# Allegro board smarios_ap.brd
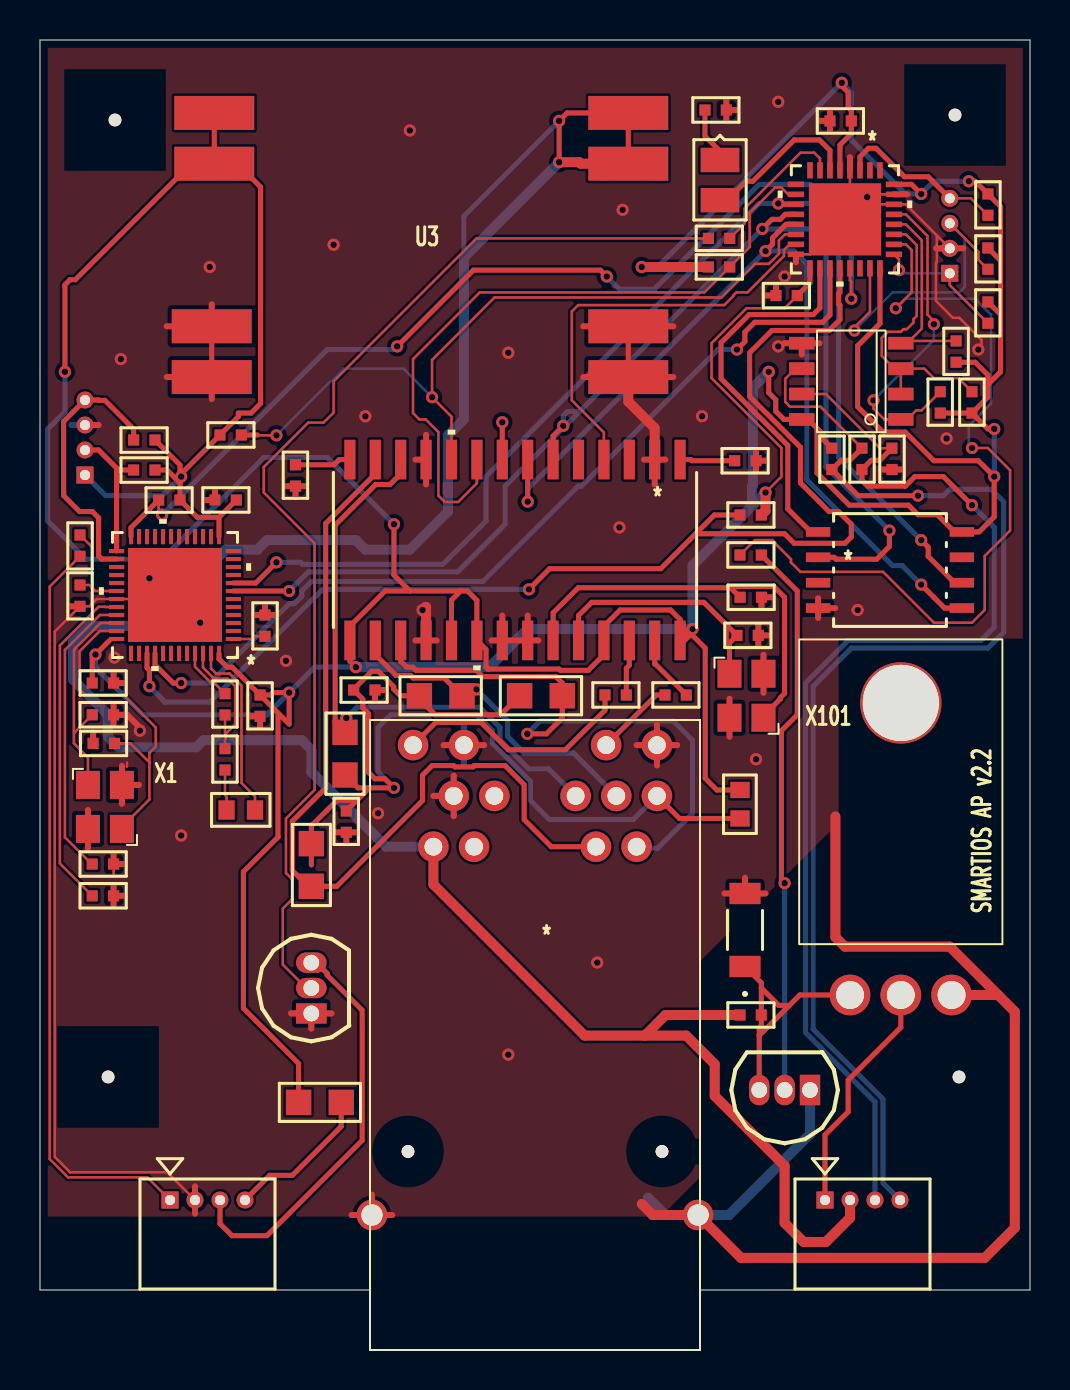
[diagram p0: board, top side]
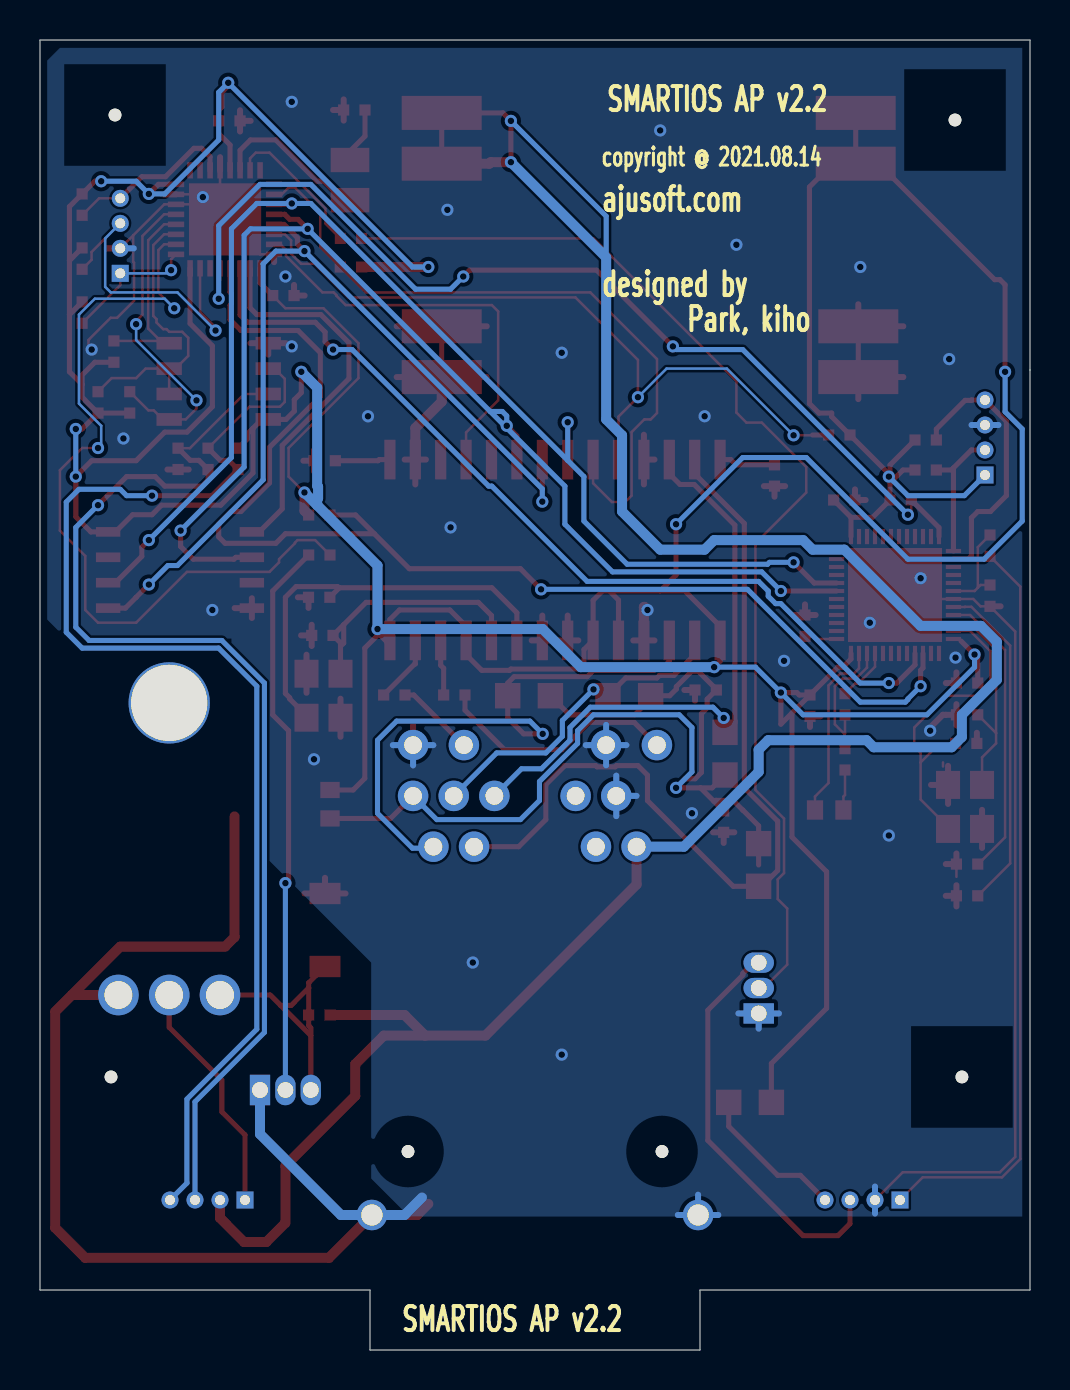
[diagram p1: board, bottom side, seen from below]

Outline 49.5 x 65.5 mm; copper layers: TOP, BOTTOM. Coordinates in mm from the lower left corner of the outline.
Outline path: 0,65.5 0,3 16.5,3 16.5,0 33,0 33,3 49.5,3 49.5,65.5 0,65.5

## Design rules (mm)
constraint set DEFAULT: min track width 0.127

## Placement (name value [footprint] x y rotation side)
C2  10uF  [SMC0402]  40.56 61.46 180 top
C3  10uF  [SMC0402]  37.87 52.72 180 top
C4  100nF  [SMC0402]  11.25 36.75 270 top
C5  100nF  [SMC0402]  8.75 42.5 0 top
C6  4.7uF  [SMC0402]  2.61 33.35 0 top
C7  0.8pF  [SMC0402]  2 38.25 270 top
C8  0.8pF  [SMC0402]  2.61 22.71 0 top
C9  100pF  [SMC0402]  2.61 24.3 0 top
C10  12pF  [SMC0402]  2.61 31.76 0 top
C11  12pF  [SMC0402]  3.72 30.33 180 top
C12  100nF  [SMC0402]  11 32.75 270 top
C13  1uF  [SMC0402]  9.25 31.75 90 top
C101  20pF  [SMC0402]  35.01 37.64 0 top
C102  20pF  [SMC0402]  34.85 35.73 0 top
C103  10uF  [SMC0402]  35.8 44.46 180 top
C104  10nF  [SMC0402]  16.75 33 180 top
C105  10nF  [SMC0402]  15.32 25.88 90 top
D1  LED  [SMD0805]  34 59.5 270 top
D2  5.6V  [SOD-80-2_3P6X1P5_ONS-M]  35.25 21 90 top
J1  CON_530480410  [CON_530480410_MOL]  2.25 43.75 90 top
J2  CON_530480410  [CON_530480410_MOL]  45.49 53.83 90 top
J4  CON_530480410  [CON_530480410_MOL]  6.5 7.5 0 top
J5  CON_530480410  [CON_530480410_MOL]  39.25 7.5 0 top
J101  RJ45-POE-XPJH-01R-1-Q22-17C  [RJ45-POE-XPJH]  24.75 6.75 0 top
L1  3.9nH  [SMR0402]  2 40.75 270 top
L2  15nH  [SMR0402]  9.25 29 90 top
L3  10uH  [SMR0603]  10.75 27 180 top
L101  10uH  [SMR0603]  35 28 270 top
NOREF  -  [unnamed]  3.75 61.5 90 top
NOREF#2  -  [unnamed]  3.41 13.65 90 top
NOREF#3  -  [#2]  5 2.5 0 top
NOREF#4  -  [#2]  0 3 90 top
NOREF#5  -  [#2]  45.75 61.75 0 top
NOREF#6  -  [#2]  0 65.5 0 top
NOREF#7  -  [#2]  16.5 0 90 top
NOREF#8  -  [#2]  11.75 2.5 0 top
NOREF#9  -  [#2]  45.75 61.75 90 top
NOREF#10  -  [unnamed]  45.75 61.75 90 top
NOREF#11  -  [#2]  46.52 3 90 top
NOREF#12  -  [unnamed]  45.95 13.65 90 top
NOREF#13  -  [#2]  0 2.5 0 top
NOREF#14  -  [#2]  45.95 13.65 0 top
NOREF#15  -  [#2]  3.5 0 90 top
Q1  2N5551  [TO92]  13.56 16.83 90 top
Q2  IRF540N/TO  [TO220ABH]  40.5 17.75 270 top
Q3  2N5551  [TO92]  38.5 13 180 top
R1  1k  [SMR0402]  7 42.5 180 top
R2  1k  [SMR0402]  5.75 44 180 top
R3  1k  [SMR0402]  5.75 45.5 180 top
R4  1k  [SMR0402]  47.39 57.8 270 top
R5  1k  [SMR0402]  47.39 52.4 270 top
R6  1k  [SMR0402]  47.39 55.1 270 top
R7  1k  [SMR0402]  35 41.75 0 top
R8  50R  [SMR0805]  12.93 12.38 0 top
R9  2K7  [SMR0402]  33.42 55.58 0 top
R10  1k  [SMR0402]  33.25 62 0 top
R11  2k7  [SMR0402]  35 16.75 0 top
R12  10K  [SMR0402]  35 39.75 0 top
R14  10K  [SMR0402]  39.6 45.09 270 top
R15  10K  [SMR0402]  42.6 45.09 270 top
R16  120R  [SMR0402]  41.1 45.09 270 top
R17  10K  [SMR0402]  46.6 46.85 90 top
R18  10K  [SMR0402]  45.81 49.39 90 top
R19  10K  [SMR0402]  45.01 46.85 90 top
R101  210K  [SMR0402]  9 45.75 0 top
R102  110K  [SMR0402]  33.42 54.15 0 top
R103  2K7  [SMR0402]  12.77 43.19 90 top
R104  1k  [SMR0402]  28.25 32.75 0 top
R105  1k  [SMR0402]  31.25 32.75 0 top
R106  50R  [SMR0805]  13.57 23.18 90 top
R107  50R  [SMR0805]  15.25 28.75 90 top
R108  50R  [SMR0805]  26.11 32.71 180 top
R109  50R  [SMR0805]  18.97 32.71 0 top
U1  NRF52832-QFAA-R  [QFN-48_NOR]  6.75 37.75 180 top
U2  IS25LP080  [SOIC8_208MIL-L]  42.5 39 0 top
U3  MP1584_Board  [MP1584_MODULE]  19 55.25 0 top
U4  STM32L082KB  [UFQFPN32-5X5MM-L]  40.25 56.53 270 top
U5  MAX485/SO  [SOIC8]  40.56 48.43 180 top
U101  ENC28J60-ISO  [SOIC28-W_MC_MCH]  23.75 40 270 top
X1  32MHz  [SMD-3225_4P]  3.25 27.15 90 top
X101  25MHz  [SMD-3225_4P]  35.32 32.71 90 top

## Library data of the parts
C2 C3 = CAP POL
C4-C13 C101-C105 = CAP NP
D1 = LED_0
D2 = DIODE ZENER: User Part Number: PN; Tolerance: TOL
J1 J2 J4 J5 = 530480410: User Part Number: PN; Tolerance: TOL
J101 = RJ45-POE-XPJH-01R-1-Q22-17C
L1-L3 = INDUCTOR
L101 = INDUCTOR/SM
Q1 Q3 = 2N5551
Q2 = IRF540N/TO
R1-R10 R101-R105 = R
R11 R12 R14-R19 R106-R109 = RESISTOR
U1 = NRF52832-QFAA-R_0: User Part Number: PN; Tolerance: TOL
U2 = IS25LPxxx: User Part Number: PN; Tolerance: TOL
U3 = MP1584_Board_3
U4 = STM32L412K8_8: User Part Number: PN; Tolerance: TOL
U5 = MAX485/SO_2: Tolerance: ***; User Part Number: ***
U101 = ENC28J60-ISO_0: User Part Number: PN; Tolerance: TOL
X1 X101 = CRYSTAL_0

## Footprints (pads in the part's own frame, mm; a bottom-side part is the same pattern mirrored in y, then rotated)
CON_530480410_MOL
  rect 0.85x0.85 hole 0.5: 1(0,0)
  round 0.85 hole 0.5: 2(1.25,0) 3(2.5,0) 4(3.75,0)
MP1584_MODULE
  rect 4x1.7 smd: 1(-10.287,6.604) 2(-10.287,4.064) 3(-10.414,-4.064) 4(-10.414,-6.604) 5(10.414,-6.604) 6(10.414,-4.064) 7(10.414,4.064) 8(10.414,6.604)
QFN-48_NOR
  rect 0.762x0.203 smd: 1(-2.921,2.2) 2(-2.921,1.8) 3(-2.921,1.4) 4(-2.921,1) 5(-2.921,0.6) 6(-2.921,0.2) 7(-2.921,-0.2) 8(-2.921,-0.6) 9(-2.921,-1) 10(-2.921,-1.4) 11(-2.921,-1.8) 12(-2.921,-2.2) 25(2.921,-2.2) 26(2.921,-1.8) 27(2.921,-1.4) 28(2.921,-1) 29(2.921,-0.6) 30(2.921,-0.2) 31(2.921,0.2) 32(2.921,0.6) 33(2.921,1) 34(2.921,1.4) 35(2.921,1.8) 36(2.921,2.2)
  rect 0.203x0.762 smd: 13(-2.2,-2.921) 14(-1.8,-2.921) 15(-1.4,-2.921) 16(-1,-2.921) 17(-0.6,-2.921) 18(-0.2,-2.921) 19(0.2,-2.921) 20(0.6,-2.921) 21(1,-2.921) 22(1.4,-2.921) 23(1.8,-2.921) 24(2.2,-2.921) 37(2.2,2.921) 38(1.8,2.921) 39(1.4,2.921) 40(1,2.921) 41(0.6,2.921) 42(0.2,2.921) 43(-0.2,2.921) 44(-0.6,2.921) 45(-1,2.921) 46(-1.4,2.921) 47(-1.8,2.921) 48(-2.2,2.921)
  rect 4.699x4.699 smd: 49(0,0)
RJ45-POE-XPJH
  round 0.635 hole 3.175 unplated: (-6.35,3.175) (6.35,3.175)
  round 1.524 hole 0.889: 1(5.08,18.415) 2(3.048,18.415) 5(-3.048,18.415) 6(-5.08,18.415) 7(6.096,20.955) 8(4.064,20.955) 9(2.032,20.955) 10(-2.032,20.955) 11(-4.064,20.955) 12(6.096,23.495) 13(3.556,23.495) 14(-3.556,23.495) 15(-6.096,23.495)
  round 1.524 hole 1.067: 16(-8.153,0) 17(8.153,0)
SMC0402
  rect 0.559x0.559 smd: 1(0,0) 2(1.067,0)
SMD0805
  rect 1.219x1.93 smd: A(2.007,0) C(0,0)
SMD-3225_4P
  rect 1.4x1.2 smd: 1(-1.1,-0.85) 2(1.1,-0.85) 3(1.1,0.85) 4(-1.1,0.85)
SMR0402
  rect 0.559x0.559 smd: 1(0,0) 2(1.067,0)
SMR0603
  rect 0.813x0.965 smd: 1(0,0) 2(1.422,0)
SMR0805
  rect 1.27x1.27 smd: 1(0,0) 2(2.134,0)
SOD-80-2_3P6X1P5_ONS-M
  rect 1.067x1.551 smd: 1(-1.825,0) 2(1.825,0)
SOIC8
  rect 1.27x0.635 smd: 1(-2.477,1.905) 2(-2.477,0.635) 3(-2.477,-0.635) 4(-2.477,-1.905) 5(2.477,-1.905) 6(2.477,-0.635) 7(2.477,0.635) 8(2.477,1.905)
SOIC8_208MIL-L
  rect 1.219x0.483 smd: 1(-3.594,1.905) 2(-3.594,0.635) 3(-3.594,-0.635) 4(-3.594,-1.905) 5(3.594,-1.905) 6(3.594,-0.635) 7(3.594,0.635) 8(3.594,1.905)
SOIC28-W_MC_MCH
  rect 1.981x0.559 smd: 1(-4.521,8.255) 2(-4.521,6.985) 3(-4.521,5.715) 4(-4.521,4.445) 5(-4.521,3.175) 6(-4.521,1.905) 7(-4.521,0.635) 8(-4.521,-0.635) 9(-4.521,-1.905) 10(-4.521,-3.175) 11(-4.521,-4.445) 12(-4.521,-5.715) 13(-4.521,-6.985) 14(-4.521,-8.255) 15(4.521,-8.255) 16(4.521,-6.985) 17(4.521,-5.715) 18(4.521,-4.445) 19(4.521,-3.175) 20(4.521,-1.905) 21(4.521,-0.635) 22(4.521,0.635) 23(4.521,1.905) 24(4.521,3.175) 25(4.521,4.445) 26(4.521,5.715) 27(4.521,6.985) 28(4.521,8.255)
TO92
  rect 1.016x1.524 hole 0.787: 1(0,0)
  oval 1.016x1.524 hole 0.787: 2(1.27,0) 3(2.54,0)
TO220ABH
  round 2.032 hole 1.397: 1(0,0) 2(0,2.54) 3(0,5.08)
  round 4.064 hole 3.81: 4(-14.605,2.54)
UFQFPN32-5X5MM-L
  rect 0.813x0.279 smd: 1(-2.451,1.75) 2(-2.451,1.25) 3(-2.451,0.75) 4(-2.451,0.25) 5(-2.451,-0.25) 6(-2.451,-0.75) 7(-2.451,-1.25) 8(-2.451,-1.75) 17(2.451,-1.75) 18(2.451,-1.25) 19(2.451,-0.75) 20(2.451,-0.25) 21(2.451,0.25) 22(2.451,0.75) 23(2.451,1.25) 24(2.451,1.75)
  rect 0.279x0.813 smd: 9(-1.75,-2.451) 10(-1.25,-2.451) 11(-0.75,-2.451) 12(-0.25,-2.451) 13(0.25,-2.451) 14(0.75,-2.451) 15(1.25,-2.451) 16(1.75,-2.451) 25(1.75,2.451) 26(1.25,2.451) 27(0.75,2.451) 28(0.25,2.451) 29(-0.25,2.451) 30(-0.75,2.451) 31(-1.25,2.451) 32(-1.75,2.451)
  rect 3.607x3.607 smd: 33(0,0)
unnamed
  round 0.635 hole 3.175 unplated: (0,0)

## Nets
3V3: C2.1 C3.1 C5.2 C6.1 C12.1 J1.1 L101.1 R1.1 R2.1 R3.1 R4.1 R5.1 R6.1 R7.2 R8.1 R14.1 R17.1 R18.1 R19.1 R101.1 R102.1 U1.13 U1.36 U1.48 U2.8 U3.1 U3.2 U4.5 U4.17 U4.24 U4.32 U5.8(VCC) U101.15 U101.19 U101.20 U101.25 U101.28
485A: J5.4 R14.2 R16.1 U5.6
485B: J5.3 R15.1 R16.2 U5.7
485DE: R17.2 U4.27 U5.2 U5.3
485RX: R19.2 U4.29 U5.1
485TX: R18.2 U4.28 U5.4
ANT: J4.1 L1.2
BLE_SS: U1.40 U4.19
BLERDY: R7.1 U1.39 U4.20
DOORSIG: R12.1 U4.26
INT: U4.15 U101.4
LAN_RST: R101.2 U4.14 U101.10
LAN_SS: R102.2 U4.10 U101.9
LED_A: J4.4 R8.2
LED_K: J4.3 Q1.3
LED_LINE: D1.A U4.6
LEDA: R105.2 U101.27
LEDB: R104.2 U101.26
LEDSIG: R9.2 U4.7
MEM_CS: U2.1 U4.18
MISO: U1.7 U2.2 U4.12 U101.6
MOSI: U2.5 U4.13 U101.7
NRST: J2.4 R4.2 U4.3
NRST_1: R1.2 U1.24 U4.21
POE+: J5.2 J101.6 R11.1 U3.7 U3.8(IN2)
POE-: C2.2 C3.2 C4.1 C5.1 C6.2 C7.2 C8.2 C9.2 C10.2 C11.2 C12.2 C101.2 C102.2 C103.1 C104.1 C105.1 D2.2 J1.3 J2.2 J4.2 J101.11 J101.12 J101.14(YLED_K) J101.16 J101.17 Q1.1(EMITTER) Q2.3(S) Q3.1(EMITTER) R10.2 R15.2 R103.1 U1.31 U1.49 U2.4 U3.3 U3.4 U3.5 U3.6 U4.4(VSSA) U4.16 U4.30 U4.31 U4.33 U5.5 U101.2 U101.11 U101.18(VSSTX) U101.21 U101.22 X1.2 X1.4(GND2) X101.2 X101.4(GND2)
RX+: J101.2 R106.1 U101.13
RX-: J101.9 R107.2 U101.12
RXD: U4.9
SCK: U1.8 U2.6 U4.11 U101.8
SWCLK: J2.1 R5.2 U4.25
SWCLK_1: J1.2 R2.2 U1.25
SWDIO: J2.3 R6.2 U4.23
SWDIO_1: J1.4 R3.2 U1.26
TX+: J101.1 R108.1 U101.17
TX-: J101.8 R109.2 U101.16
TXD: U4.8
N01924: C101.1 U101.23 X101.1
N01933: C102.1 U101.24 X101.3
N03095: R103.2 U101.14
N03125: C103.2 U101.1
N03600: J101.13 R105.1
N03602: J101.15 R104.1
N03982: C104.2 C105.2 J101.7 L101.2 R106.2 R107.1 R108.2 R109.1
N99742: J5.1 Q2.2
N99768: D2.1(CATHODE) Q2.1 Q3.3 R11.2
N99852: Q3.2 R12.2
N100473: D1.C(CATHODE) R10.1
N100557: Q1.2 R9.1
N109479: C4.2 U1.1
N112351: C7.1 L1.1 U1.30
N112725: C8.1 U1.32
N112729: C9.1 U1.33
N112745: C10.1 U1.34 X1.3
N112777: C11.1 U1.35(XC2) X1.1
N112868: L3.1 U1.47
N112917: C13.1 L2.2 U1.46
N112982: C13.2 U1.45
N1121240: L2.1 L3.2

Pads without a net: J101 5 10; Q2 4; U1 2 3 4 5 6 9 10 11 12 14 15 16 17 18 19 20 21 22 23 27 28 29 37 38 41 42 43 44; U2 3 7; U4 1 2 22; U101 3 5

## Via types
v1: diameter 0.61, hole 0.33, TOP to BOTTOM, 78 vias

## Routing (per net, layer and track width the routed paths; a pad name or vN(x,y) marks a point on that pad's centre or on a via; arc(x,y) is an arc through that point)
3V3: length 314.6
  TOP w0.127: C3.1 37.23,52.09 35.32,52.09 33.58,50.34 33.58,48.59 37.07,45.1 37.07,43.67 v1(36.28,42.88) ; 3.45,35.45 3.55,35.55 U1.36
  TOP w0.254: U4.24 42,51.33 40.88,50.21 40.88,47.16 42.15,45.89 43.26,45.89 44.69,44.46 46.92,44.46 v1(47.71,43.67) 47.71,41.66 46.96,40.91 U2.8 45.73,40.91 44.87,41.76 43.9,41.76 43.42,42.24 40.46,42.24 38.85,43.85 38.85,46.08 ; R17.1 47.39,46.05 v1(47.71,46.05) ; R17.1 R19.1 ; R17.1 47.39,47.64 47.39,48.28 ; 8.95,41.63 7.87,41.63 R1.1 7,43.35 ; 8.95,41.63 C5.2 ; 8.95,41.63 U1.13 ; v1(40.09,63.36) 40.09,63.2 40.41,62.88 40.41,62.15 40.56,61.99 C2.1 40.56,60.82 40,60.25 U4.5 ; 21.03,37.95 18.49,37.95 ; 21.03,37.95 20.57,37.5 U101.19 ; 21.03,37.95 21.37,37.95 21.84,37.48 U101.20 22.3,35.02 22.3,34.14 22.4,34.05 25.95,34.05 26.02,33.98 27.41,33.98 28.2,34.77 U101.25 28.2,36.19 29.01,37 31.53,37 32,36.52 32,35.48 ; 18.49,37.95 17.26,37.95 15.49,36.19 U101.15 15.49,34.44 v1(15.79,34.14) ; 18.49,37.95 17.7,38.75 v1(17.7,41.29) ; U3.2 U3.1 ; U3.2 9.86,59.31 11.03,58.15 11.03,47.32 10.55,46.85 9.92,46.85 9.92,46.67 R101.1 7.06,43.81 ; U3.2 7.56,59.31 1.76,53.52 1.5,53.52 1.25,53.26 v1(1.25,48.91) ; 7,43.35 7,43.75 ; 7,43.35 6.35,44 R2.1 ; 7,43.75 7,44.25 R3.1 ; 7,43.75 7.06,43.81 ; 38.85,46.08 38.41,46.53 U5.8 37.2,46.53 36.79,46.94 36.79,47.51 36.44,47.86 v1(36.44,48.91) ; 38.85,46.08 39.14,45.8 39.14,45.55 R14.1 ; 48.03,51.77 48.03,54.47 ; 48.03,51.77 R5.1 ; 48.03,51.77 48.03,48.91 47.39,48.28 ; 48.03,54.47 48.03,57.17 R4.1 46.76,58.44 v1(46.44,58.44) ; 48.03,54.47 R6.1 ; v1(7.06,43.67) 7.06,43.81 ; 11.9,31.85 12.46,31.29 v1(12.46,32.87) 11.65,32.87 11.53,32.75 C12.1 ; 11.9,31.85 11.9,25.65 10.17,23.91 10.17,17.09 12.93,14.33 R8.1 ; 11.9,31.85 C12.1 ; U1.48 8.95,34.55 9.36,34.14 9.61,34.14 C12.1 ; 3.45,35.45 v1(2.77,34.77) 2.61,34.61 C6.1 ; v1(44.06,57.8) 43.58,58.28 U4.32 ; R18.1 46.76,49.39 47.39,48.75 47.39,48.28 ; L101.1 33.84,28 33.26,28.58 33.26,35.09 32.54,35.82 32.54,35.96 ; C3.1 38.5,53.35 U4.17
  TOP w0.5: v1(32.62,36.05) 32.06,35.48 32,35.48 ; v1(36.28,42.88) 36.28,41.96 R7.2 ; v1(30.08,54.15) R102.1
  BOTTOM w0.254: v1(2.77,34.77) 2.77,34.14 5.15,31.76 11.35,31.76 v1(12.46,32.87) 13.73,34.14 v1(15.79,34.14) ; v1(47.71,43.67) v1(47.71,46.05) ; v1(1.25,48.91) 1.25,46.91 0.39,46.05 0.39,41.45 2.29,39.54 6.11,39.54 11.19,44.62 14.36,44.62 v1(17.7,41.29) ; v1(7.06,43.67) 6.11,42.72 3.28,42.72 J1.1 ; v1(46.44,58.44) 44.69,58.44 v1(44.06,57.8) 43.26,57.8 40.56,60.5 40.56,62.88 v1(40.09,63.36) 30.88,54.15 v1(30.08,54.15)
  BOTTOM w0.5: 35.64,42.24 35.64,42.55 35.6,42.59 35.6,43.16 35.64,43.2 35.64,48.12 v1(36.44,48.91) ; 35.64,42.24 32.62,39.22 v1(32.62,36.05) 24.37,36.05 22.46,34.14 v1(15.79,34.14) ; 35.64,42.24 v1(36.28,42.88)
485A: length 63.1
  TOP w0.127: R16.1 39.03,47.16 37.5,47.16 37.26,47.4 37.26,48.56 37.77,49.07 U5.6
  TOP w0.254: R16.1 40.49,44.48 40.06,44.48 R14.2 40.9,42.72 v1(43.9,42.72)
  BOTTOM w0.254: v1(43.9,42.72) 45.17,42.72 45.49,43.03 47.55,43.03 48.19,42.4 48.19,35.89 47.39,35.09 40.56,35.09 38.66,33.19 38.66,16.04 42.15,12.55 42.15,8.35 J5.4
485B: length 59
  TOP w0.127: U5.7 39.29,47.8 42,45.09 R15.1
  TOP w0.254: v1(46.6,42.24) 45.17,43.67 43.74,43.67 43.26,43.19 41.4,43.19 41.1,43.49 R16.2 41.56,44.48 41.99,44.48 R15.1
  BOTTOM w0.254: J5.3 41.75,12.41 38.28,15.88 38.28,33.35 40.41,35.48 47.04,35.48 47.71,36.14 47.71,41.13 v1(46.6,42.24)
485DE: length 14.6
  TOP w0.127: U5.2 U5.3 ; U5.3 44.22,49.07 44.69,48.59 45.92,48.59 R17.2 ; U5.3 42.72,49.07 42.09,49.7 42.09,50.61 42.39,50.91 43.04,50.91 43.17,51.04 43.34,51.04 43.67,51.37 43.67,51.54 43.84,51.71 43.84,55.24 43.3,55.78 U4.27
485RX: length 16.3
  TOP w0.127: v1(41.68,47.48) 41.68,47.07 42.22,46.53 U5.1 43.36,46.53 43.81,46.98 44.08,46.98 R19.2 ; U4.29 43.3,56.78 44.38,55.7 44.38,51.77 44.69,51.45 v1(44.69,51.29)
  BOTTOM w0.127: v1(41.68,47.48) 44.69,50.5 v1(44.69,51.29)
485TX: length 9.8
  TOP w0.127: 43.47,50.45 43.36,50.34 U5.4 ; 43.47,50.45 44.09,51.07 44.09,55.49 43.3,56.28 U4.28 ; 43.47,50.45 R18.2
ANT: length 37.6
  TOP w0.127: J4.1 5.37,8.63 1.4,8.63 0.48,9.55 0.48,38.17 L1.2
BLE_SS: length 45.1
  TOP w0.254: U4.19 39.5,51.75 39.14,51.39 35.74,51.39 35.24,50.9 35.24,50.42 v1(34.85,50.02) ; U1.40 5.75,34.26 6.66,33.35 v1(7.06,33.35)
  BOTTOM w0.254: v1(7.06,33.35) 8.49,33.35 12.46,37.32 12.72,37.32 13.09,37.69 13.09,37.95 13.57,38.43 22.14,38.43 26.91,43.19 27.07,43.19 33.9,50.02 v1(34.85,50.02)
BLERDY: length 63
  TOP w0.254: v1(5.47,33.19) 5.47,33.98 5.35,34.1 U1.39 ; 32.78,40.81 33.72,41.75 R7.1 ; 32.78,40.81 37.23,40.81 37.71,40.34 40.25,40.34 40.56,40.65 40.56,41.29 39.93,41.92 39.45,41.92 38.02,43.35 38.02,45.13 35.48,47.68 35.48,49.86 36.59,50.97 39.45,50.97 40,51.52 40,52.24 39.93,52.3 39.93,52.82 40,52.89 U4.20 ; 32.78,40.81 31.04,39.06 25.48,39.06 v1(24.45,38.03)
  BOTTOM w0.254: v1(24.45,38.03) 14.12,38.03 8.49,32.4 6.23,32.4 6.11,32.52 6.11,32.55 v1(5.47,33.19)
DOORSIG: length 41.2
  TOP w0.127: U4.26 43.3,55.28 43.58,55 43.58,52.88 v1(42.79,52.09) ; v1(46.6,45.1) 47.39,45.1 48.5,43.99 48.5,40.97 47.23,39.7 47.23,37 46.6,36.37 44.69,36.37 42.15,38.91 38.02,38.91 37.55,39.38 37.55,39.54 36.75,40.34 36.75,40.37 36.63,40.49 35.74,40.49 R12.1
  BOTTOM w0.127: v1(42.79,52.09) 43.26,52.56 46.76,52.56 47.55,51.77 47.55,47.32 46.44,46.21 46.44,45.26 v1(46.6,45.1)
INT: length 20.9
  TOP w0.127: U101.4 28.2,45.88 26.59,47.48 26.59,51.93 26.91,52.25 34.21,52.25 34.69,52.72 34.69,52.75 34.82,52.88 35.38,52.88 37.2,54.7 37.2,55 37.48,55.28 U4.15
LAN_RST: length 38.1
  TOP w0.127: 10.87,45.75 10.88,45.73 v1(11.82,45.73) ; U101.10 20.57,46.67 v1(19.6,47.64) 19.6,49.5 22.73,52.63 34.08,52.63 35.76,54.31 36.45,54.31 36.95,54.81 36.95,55.48 37.25,55.78 U4.14
  TOP w0.254: 10.87,45.75 R101.2
  BOTTOM w0.127: v1(19.6,47.64) 18.17,49.07 15.16,49.07 v1(11.82,45.73)
LAN_SS: length 35
  TOP w0.127: U101.9 21.84,43.34 20.9,42.4 20.24,42.4 19.92,42.72 19.92,45.89 19.29,46.53 18.97,46.53 18.65,46.85 18.65,49.55 21.99,52.88 33.22,52.88 R102.2 35.48,55.15 35.48,56.85 36.75,58.12 37.07,58.12 37.41,57.78 U4.10
LED_A: length 7.5
  TOP w0.254: J4.4 11.48,8.73 12.62,8.73 15.06,11.18 R8.2
LED_K: length 20.6
  TOP w0.254: Q1.3 13.82,19.37 14.36,18.83 14.36,18.74 16.11,16.99 16.11,10.48 11.35,5.72 9.6,5.72 9,6.32 J4.3
LED_LINE: length 8
  TOP w0.254: D1.A 34.36,57.49 35.3,58.44 35.64,58.44 37.71,60.5 38.98,60.5 39.5,59.98 U4.6
LEDA: length 3.4
  TOP w0.254: U101.27 30.73,34.3 30.77,34.3 R105.2
LEDB: length 2.8
  TOP w0.254: R104.2 29.32,34.09 29.46,34.23 U101.26
LEDSIG: length 7.4
  TOP w0.127: R9.2 35.23,56.32 35.23,57.07 38.02,59.87 38.71,59.87 39,59.58 U4.7
MEM_CS: length 19.3
  TOP w0.254: U4.18 39,52.11 38.66,51.77 35.46,51.77 34.05,50.37 34.05,48.57 37.39,45.23 37.39,42.05 38.54,40.91 U2.1
MISO: length 64.4
  TOP w0.254: U1.7 v1(12.46,37.95) ; v1(36.12,56.06) 36.59,56.53 37.01,56.53 37.26,56.78 U4.12 ; v1(42.47,40.97) 42.47,40.18 41.84,39.54 39.8,39.54 39.71,39.63 U2.2 ; v1(26.16,46.21) 25.66,45.7 U101.6
  BOTTOM w0.254: 26.99,46.93 23.26,43.19 23.26,41.29 20.87,38.91 13.41,38.91 v1(12.46,37.95) ; 26.99,46.93 v1(36.12,56.06) 38.98,56.06 39.29,55.74 39.29,44.15 v1(42.47,40.97) ; 26.99,46.93 26.38,46.93 26.16,46.71 v1(26.16,46.21)
MOSI: length 45.4
  TOP w0.254: v1(36.28,54.94) 36.63,55.3 36.63,55.61 37.3,56.28 U4.13 ; v1(44.06,38.27) 44.69,37.64 44.69,37.63 45.23,37.09 U2.5 ; U101.7 v1(24.39,42.42)
  BOTTOM w0.254: v1(44.06,38.27) 43.11,39.22 42.63,39.22 38.34,43.51 38.34,54.31 37.71,54.94 v1(36.28,54.94) 24.39,43.05 v1(24.39,42.42)
NRST: length 8.6
  TOP w0.127: J2.4 46.55,57.58 R4.2
  TOP w0.254: J2.4 44.41,58.66 43.22,58.66 41.8,60.09 41.42,60.09 41,59.66 U4.3
NRST_1: length 51.4
  TOP w0.127: R1.2 5.93,41.94 v1(6.11,41.76) ; v1(40.56,52.56) 40.56,53.42 40.5,53.48 U4.21
  TOP w0.254: v1(17.86,50.18) 21.67,53.99 28.02,53.99 v1(28.34,53.67) ; R1.2 4.55,41.12 U1.24
  BOTTOM w0.254: v1(6.11,41.76) 14.36,50.02 17.7,50.02 v1(17.86,50.18) ; v1(28.34,53.67) 28.97,53.04 30.72,53.04 35.96,58.28 38.5,58.28 40.56,56.22 v1(40.56,52.56)
POE+: length 126.4
  TOP w0.254: U3.7 U3.8 26.35,61.85 v1(25.96,61.46) v1(25.96,59.39)
  TOP w0.5: 30.24,15.72 32.31,15.72 33.74,14.29 33.74,12.7 37.23,9.21 37.23,6.35 38.18,5.4 39.29,5.4 40.5,6.6 J5.2 ; 30.24,15.72 31.27,16.75 R11.1 ; 30.24,15.72 27.23,15.72 19.67,23.28 J101.6 ; v1(25.96,59.39) 26.96,59.39 27.04,59.31 U3.7
  BOTTOM w0.254: 21.19,54.63 21.19,56.69 v1(25.96,61.46)
  BOTTOM w0.5: J101.6 17.31,25.16 13.57,28.9 13.57,30.01 13.09,30.49 8.17,30.49 7.82,30.14 3.92,30.14 3.41,30.65 3.41,31.76 1.66,33.51 1.66,35.41 2.45,36.21 5.47,36.21 9.28,40.02 10.87,40.02 11.35,40.49 15.79,40.49 16.27,40.02 18.49,40.02 20.4,41.92 20.4,45.73 21.19,46.53 21.19,54.63 v1(25.96,59.39)
POE-: length 243.1
  TOP w0.127: C9.2 3.68,23.66 ; J2.2 44.84,55.73 ; 44.84,55.73 43.29,57.28 U4.30 41,57.28 ; 44.84,55.73 44.84,54.41 44.8,54.37 44.8,52.46 45.65,51.61 45.96,51.61 47.08,50.5 47.08,50.18 v1(46.92,50.02) ; 41,57.28 40.5,56.78 ; 41,57.28 v1(41.36,57.64) 41.5,57.78 U4.31 ; 40.5,56.78 U4.33 38.5,54.78 U4.16 ; 40.5,56.78 U4.4 ; U1.49 6.55,37.55 U1.31 2.84,37.55 2.47,37.18 C7.2 0.74,35.92 0.74,9.65 1.51,8.89 6.36,8.89 J4.2 ; 4.35,29.18 4.35,29.38
  TOP w0.254: U3.4 U3.3 ; U3.5 U3.6
  TOP w0.3: C10.2 4.36,31.76 4.99,31.12 v1(4.99,30.97) ; C10.2 3.68,32.29 ; C10.2 3.68,31.23 ; U5.5 38.97,50.34 ; U5.5 38.09,49.77 ; U5.5 37.2,50.34 ; 10.72,36.75 C4.1 ; C4.1 11.78,36.75 ; C4.1 11.25,37.28 ; 35.8,43.93 C103.1 ; C103.1 36.33,44.46 ; C103.1 35.8,44.99 ; 2.4,25.1 X1.4 2.4,27.01 ; 19.84,35.48 U101.18 18.77,35.48 ; J101.16 17.61,6.75 ; J101.16 15.58,6.75 ; J101.16 16.6,7.76 ; 36.07,37.11 C101.2 36.6,37.64 ; U101.11 19.3,45.76 ; U101.11 18.77,44.52 ; U101.11 19.3,43.28 ; 34.47,30.66 X101.4 34.47,32.56 ; 22.21,30.25 J101.14 20.18,30.25 ; 29.83,30.25 J101.12 ; J101.12 31.86,30.25 ; J101.12 30.85,31.26 ; J101.12 30.85,29.23 ; 1.47,37.18 C7.2 ; 6.33,48.65 U3.4 8.59,47.55 ; 3.68,33.88 C6.2 4.21,33.35 ; C2.2 39.5,61.99 ; C2.2 39.5,60.93 ; C2.2 38.97,61.46 ; 7.75,8.18 J4.2 7.75,6.82 ; 22.58,35.48 U101.21 ; U101.21 23.65,35.48 ; U101.21 23.11,36.72 ; J1.3 2.93,46.25 ; 4.1,27.3 X1.2 ; X1.2 4.1,29.21 ; X1.2 4.95,28.25 ; D2.2 35.25,23.61 ; D2.2 34.22,22.83 ; D2.2 36.28,22.83 ; U101.22 24.92,35.48 ; U101.22 24.39,36.72 ; U101.22 23.85,35.48 ; 44.81,55.08 J2.2 46.16,55.08 ; 35.91,35.2 C102.2 ; C102.2 36.45,35.73 ; C102.2 35.91,36.26 ; C8.2 3.68,23.24 ; C8.2 4.21,22.71 ; C8.2 3.68,22.18 ; 42.07,44.02 R15.2 43.13,44.02 ; 16.75,32.47 C104.1 17.28,33 ; C11.2 2.66,30.86 ; U4.31 43.36,57.78 ; 11,31.15 C12.2 10.47,31.68 ; 27.16,51.19 U3.6 31.66,51.19 ; 14.79,25.88 C105.1 ; C105.1 15.85,25.88 ; C105.1 15.32,25.35 ; 36.17,34.76 X101.2 36.17,32.86 ; 20.69,26.69 J101.11 ; J101.11 19.67,27.7 ; J101.11 20.69,28.72 ; 36.27,52.72 C3.2 36.8,53.25 ; U2.4 38.91,37.59 ; U2.4 39.77,37.09 ; U2.4 38.91,36.6 ; 30.73,43.28 U101.2 ; U101.2 30.2,44.52 ; U101.2 31.27,44.52 ; R10.2 34.32,62.53 ; R10.2 34.32,61.47 ; R10.2 34.85,62 ; 27.16,48.65 U3.5 31.66,48.65 ; 13.56,16.07 Q1.1 ; Q1.1 12.55,16.83 ; Q1.1 14.58,16.83 ; 12.77,42.66 R103.1 ; R103.1 13.31,43.19 ; R103.1 12.24,43.19 ; U4.4 40.5,59.64 ; 3.68,24.83 C9.2 4.21,24.3 ; 8.22,42.5 C5.1 8.75,43.03 ; 6.33,51.19 U3.3 8.59,52.29 ; 37.8,54.39 U4.16
  TOP w0.5: U101.2 30.73,46.1 29.41,47.42 U3.5 ; 19.3,37.14 19.27,37.14 v1(19.13,37) ; 19.3,37.14 19.29,37.16 ; 19.3,37.14 U101.18 ; 47.91,17.75 48.74,16.92 48.74,6.11 47.23,4.61 35.05,4.61 J101.17 30.64,6.75 30.08,7.3 ; 47.91,17.75 Q2.3 ; 47.91,17.75 45.49,20.17 40.25,20.17 39.77,20.64 39.77,26.68
  BOTTOM w0.3: J101.12 31.86,30.25 ; J101.12 30.85,29.23 ; J101.12 29.83,30.25 ; 20.18,30.25 J101.14 ; J101.14 21.19,31.26 ; J101.14 22.21,30.25 ; J101.14 21.19,29.23 ; 2.93,46.25 J1.3 1.57,46.25 ; 20.69,26.69 J101.11 ; J101.11 19.67,27.7 ; J101.11 20.69,28.72 ; 13.56,16.07 Q1.1 ; Q1.1 14.58,16.83 ; Q1.1 12.55,16.83 ; 7.75,8.18 J4.2 7.75,6.82 ; J101.16 16.6,7.76 ; J101.16 15.58,6.75 ; J101.16 17.61,6.75 ; 44.81,55.08 J2.2
  BOTTOM w0.5: Q3.1 38.5,10.8 34.45,6.75 J101.17 31.27,6.75 30.4,7.62
  vias: v1(3.72,34.62) v1(4.04,49.55) v1(5.47,38.59) v1(7.06,25.73) v1(8.01,36.37) v1(8.49,54.15) v1(12.3,34.46) v1(14.68,55.26) v1(16.27,46.69) v1(16.9,26.84) v1(18.49,60.98) v1(23.41,49.86) v1(23.41,14.77) v1(27.86,19.37) v1(28.97,41.13) v1(29.13,57.01) v1(33.1,46.69) v1(35.8,29.54) v1(36.91,62.41) v1(36.91,50.18) v1(37.23,53.67) v1(40.88,37) v1(45.33,45.58)
RX+: length 43.8
  TOP w0.254: U101.13 16.77,43.81 14.28,41.33 14.28,28.11 12.62,26.44 12.62,23.98 13.41,23.18 R106.1 14.84,23.18 19.13,27.47 19.13,28.74 19.6,29.22 20.68,29.22 20.74,29.16 21.65,29.16 21.71,29.22 23.26,29.22 24.21,28.27 24.21,26.52 25.56,25.16 J101.2
RX-: length 30.3
  TOP w0.254: v1(15.32,31.6) 15.32,30.95 R107.2 15.24,30.88 14.76,31.37 14.76,41.24 16.79,43.28 17.5,43.28 18.04,43.81 U101.12
  BOTTOM w0.254: v1(15.32,31.6) 15.86,32.14 21.98,32.14 23,31.12 23,30.49 24.43,29.06 25.43,29.06 J101.9
SCK: length 65.2
  TOP w0.254: v1(36.91,57.33) 36.96,57.28 U4.11 ; v1(44.06,40.49) 44.41,40.14 44.41,39.68 45.73,38.37 U2.6 ; U101.8 v1(23.11,46.39) ; v1(11.82,39.38) 10.79,38.35 U1.8
  BOTTOM w0.254: v1(44.06,40.49) 39.93,44.62 39.93,56.06 38.66,57.33 v1(36.91,57.33) 35.96,57.33 23.11,44.48 ; 23.11,44.48 22.3,43.67 22.3,41.45 20.14,39.29 13.12,39.29 13.03,39.38 v1(11.82,39.38) ; 23.11,44.48 v1(23.11,46.39)
SWCLK: length 6.8
  TOP w0.127: v1(42.95,53.99) 42.95,54.53 U4.25 ; J2.1 45.49,53.24 R5.2
  BOTTOM w0.127: J2.1 43.11,53.83 v1(42.95,53.99)
SWCLK_1: length 7
  TOP w0.254: R2.2 3.93,44 3.83,44.1 ; 3.83,44.1 3.83,39.95 ; 3.83,44.1 2.93,45 J1.2
SWDIO: length 16.4
  TOP w0.127: v1(40.72,50.97) 40.72,51.13 41.5,51.91 U4.23 ; R6.2 46.92,54.51 46.92,54.9 J2.3
  BOTTOM w0.127: v1(40.72,50.97) 42.63,52.88 45.96,52.88 46.24,53.16 46.24,55.58 J2.3
SWDIO_1: length 13.9
  TOP w0.254: R3.2 4.68,46.04 3.25,47.48 2.95,47.48 2.93,47.5 J1.4 1.18,46.43 1.18,42.72 1.98,41.92 2.61,41.92 2.93,41.61 2.93,39.7 3.08,39.55 U1.26
TX+: length 29.5
  TOP w0.254: v1(24.37,30.81) 25.32,30.81 26.11,31.6 R108.1 26.11,33.35 25.8,33.67 22.14,33.67 21.83,33.98 18.81,33.98 18.65,34.14 18.33,34.14 18.04,34.44 U101.17
  BOTTOM w0.254: J101.1 29.9,25.09 30.88,25.09 32.62,26.84 32.62,30.49 31.67,31.44 25,31.44 v1(24.37,30.81)
TX-: length 16.4
  TOP w0.254: U101.16 16.77,34.77 17.8,33.73 18.52,33.73 18.65,33.6 20.21,33.6 R109.2 21.42,33.03 v1(21.83,33.03)
  BOTTOM w0.254: v1(21.83,33.03) 23.38,31.47 23.38,30.68 24.21,29.85 26.66,29.85 J101.8
N01924: length 20.9
  TOP w0.254: 34.53,38.11 C101.1 ; 34.53,38.11 34.57,38.11 34.62,38.17 36.7,38.17 37.23,37.64 37.23,32.83 37.01,32.61 37.01,32.55 36.17,31.71 X101.1 ; 34.53,38.11 26.91,38.11 25.66,36.86 U101.23
N01933: length 13.3
  TOP w0.254: 34.31,36.26 33.2,37.38 27.58,37.38 26.93,36.72 U101.24 ; 34.31,36.26 34.31,35.35 34.47,35.19 ; 34.31,36.26 C102.1 34.47,35.36 34.47,35.19 ; 34.47,35.19 X101.3
N03095: length 2.8
  TOP w0.254: R103.2 14.7,44.26 14.96,44.52 U101.14
N03125: length 2.8
  TOP w0.254: 32,44.52 32.54,44.52 32.6,44.46 C103.2
N03600: length 4
  TOP w0.254: R105.1 30.81,32.75 J101.13
N03602: length 12.2
  TOP w0.254: R104.1 28.25,31.99 26.27,30.01 23.41,30.01 22.05,31.38 19.79,31.38 J101.15
N03982: length 51
  TOP w0.254: 16.47,28.11 15.89,28.11 R107.1 ; 16.47,28.11 v1(17.7,28.11) 17.24,28.56 16.74,28.56 16.43,28.88 16.43,31.82 16.14,32.1 16.14,32.54 C104.2 15.68,33.03 16.58,33.93 16.92,33.93 17.68,33.17 17.68,33.04 18.02,32.71 R109.1 18.97,32.55 19.76,31.76 23.03,31.76 R108.2 ; 16.47,28.11 15.81,27.45 ; 13.57,24.25 R106.2 13.57,26.21 14.36,27 14.36,27 14.85,27.48 15.7,27.48 15.74,27.45 15.81,27.45 ; C105.2 15.81,27.45 ; J101.7 31.97,26.58 L101.2
  BOTTOM w0.254: v1(17.7,28.11) 16.9,28.9 16.9,31.12 17.54,31.76 21.83,31.76 22.62,30.97 22.62,30.33 24.53,28.43 24.53,27.47 25.48,26.52 29.66,26.52 J101.7
N99742: length 11.8
  TOP w0.254: J5.1 39.25,10.75 40.41,11.91 40.41,13.5 43.04,16.13 Q2.2
N99768: length 13.7
  TOP w0.254: D2.1 36.07,18.36 36.07,18.1 ; 35.96,15.72 35.96,16.11 36.07,16.22 R11.2 36.07,18.1 ; 35.96,15.72 37.47,17.23 ; 35.96,15.72 Q3.3 ; 36.07,18.1 36.94,17.23 37.47,17.23 ; 37.47,17.23 37.99,17.75 Q2.1
N99852: length 27.9
  TOP w0.254: v1(37.23,23.34) 37.07,23.5 37.07,30.97 37.86,31.76 37.86,37.95 R12.2
  BOTTOM w0.254: v1(37.23,23.34) Q3.2
N100473: length 2.8
  TOP w0.254: R10.1 33.25,60.69 34,59.94 D1.C
N100557: length 56.6
  TOP w0.127: Q1.2 13.31,18.1 12.14,19.27 12.14,22.07 12.62,22.55 12.62,23.53 12.3,23.85 12.3,26.57 13.73,28 13.73,40.34 11.19,42.88 11.19,44.15 13.41,46.37 14.18,46.37 14.68,46.87 14.68,48.43 21.83,55.58 R9.1
N109479: length 1.6
  TOP w0.127: C4.2 10.78,35.68 10.65,35.55 U1.1
N112351: length 4.8
  TOP w0.127: 2.61,38.11 2.47,38.25 C7.1 ; 2.61,38.11 2.77,37.95 U1.30 ; 2.61,38.11 2.61,40.14 L1.1
N112725: length 16.8
  TOP w0.127: C8.1 0.99,24.33 0.99,35.22 2.93,37.16 3.25,37.16 3.26,37.15 U1.32
N112729: length 14.6
  TOP w0.127: C9.1 2.59,24.3 1.25,25.64 1.25,35 3,36.75 U1.33
N112745: length 11
  TOP w0.127: U1.34 3.03,36.35 1.72,35.04 1.72,35 1.7,34.97 1.7,30.84 ; 1.7,30.84 C10.1 ; 1.7,30.84 1.7,30.33 2.4,29.63 X1.3
N112777: length 16.7
  TOP w0.127: 5.47,29.38 5.47,27.53 4.1,26.15 X1.1 ; 5.47,29.38 5.47,29.85 5.79,30.17 5.79,31.12 4.2,32.71 2.29,32.71 1.98,33.03 1.98,34.94 2.99,35.95 U1.35 ; 5.47,29.38 4.52,30.33 C11.1
N112868: length 9.1
  TOP w0.127: L3.1 10.75,27.67 10.08,28.35 10.08,33.23 9.48,33.82 8.8,33.82 8.55,34.08 U1.47
N112917: length 7
  TOP w0.127: 9.28,30.81 9.76,31.28 9.76,33.18 9.37,33.57 8.7,33.57 8.15,34.12 U1.46 ; 9.28,30.81 9.28,30.57 9.25,30.54 L2.2 ; 9.28,30.81 9.25,30.84 C13.1
N112982: length 2.7
  TOP w0.127: U1.45 7.75,34.16 8.59,33.32 8.75,33.32 C13.2
N1121240: length 2
  TOP w0.127: L2.1 9.25,27.75 9.33,27.67 L3.2

## Copper pours and planes (outline as drawn; the poured copper is in the pictures)
POE- on TOP: 0.39,6.67 31.04,6.67 32.94,8.58 32.94,19.37 39.77,26.2 39.93,26.2 39.93,35.57 49.14,35.57 49.14,65.11 0.39,65.11 ; 32 cut-outs
POE- on BOTTOM: 0.39,65.11 48.5,65.11 49.14,64.47 49.14,36.52 48.19,35.57 39.93,35.57 39.93,26.36 32.94,19.37 32.94,8.58 31.04,6.67 0.39,6.67 ; 7 cut-outs

## Text on the board
Ref Des/Silkscreen Bottom: copyright @ 2021.08.14 | Park, kiho | SMARTIOS AP v2.2 | ajusoft.com | designed by
Ref Des/Silkscreen Top: SMARTIOS AP v2.2
USER_PART_NUM_TOP: FIGURE | FINISHED_SIZE | 0.3302 | 0.5 | 0.7874 | 0.889 | 1.0668 | 1.397 | 3.81 | 3.175 | DRILL CHART: TOP to BOTTOM | ALL UNITS ARE IN MILLIMETERS | PLATED | NON-PLATED | QTY | 78 | 16 | 6 | 13 | 2 | 3 | 1
